# EAGLE board Gibbot v4.2-MotorDriverAlternate (EAGLE 5.12)
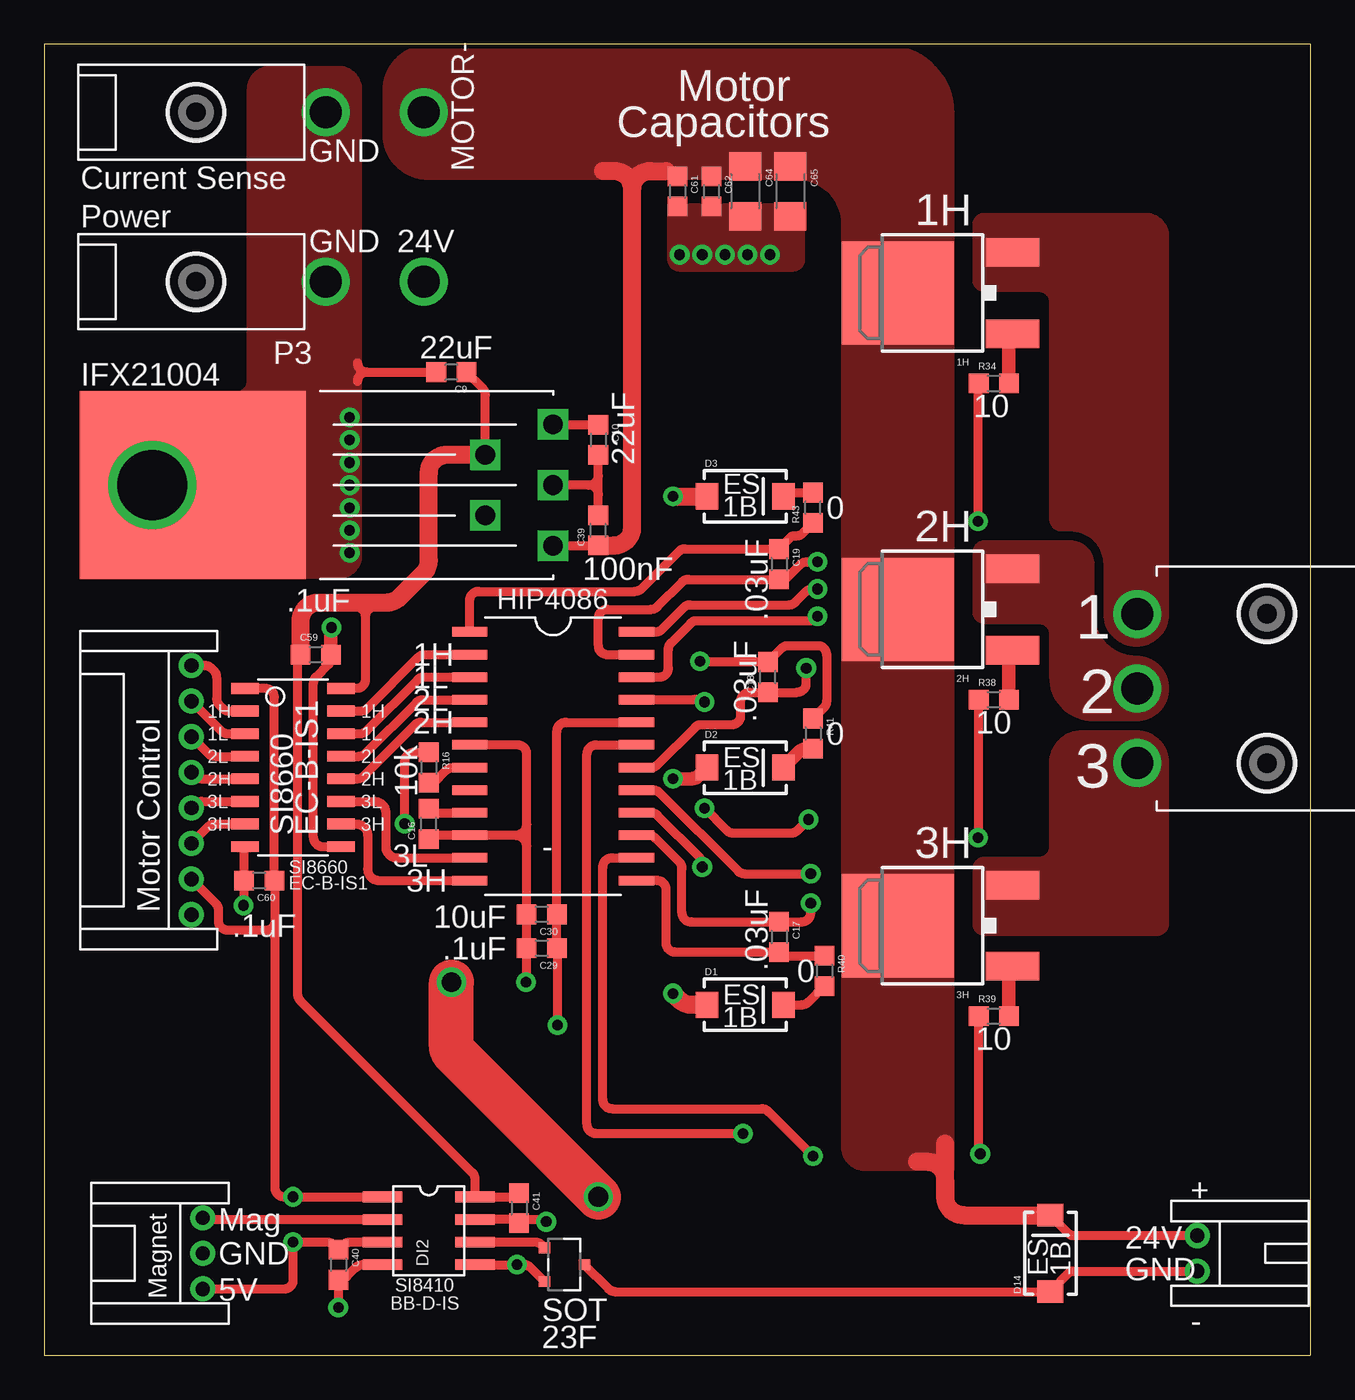
[diagram p0: board, top side]
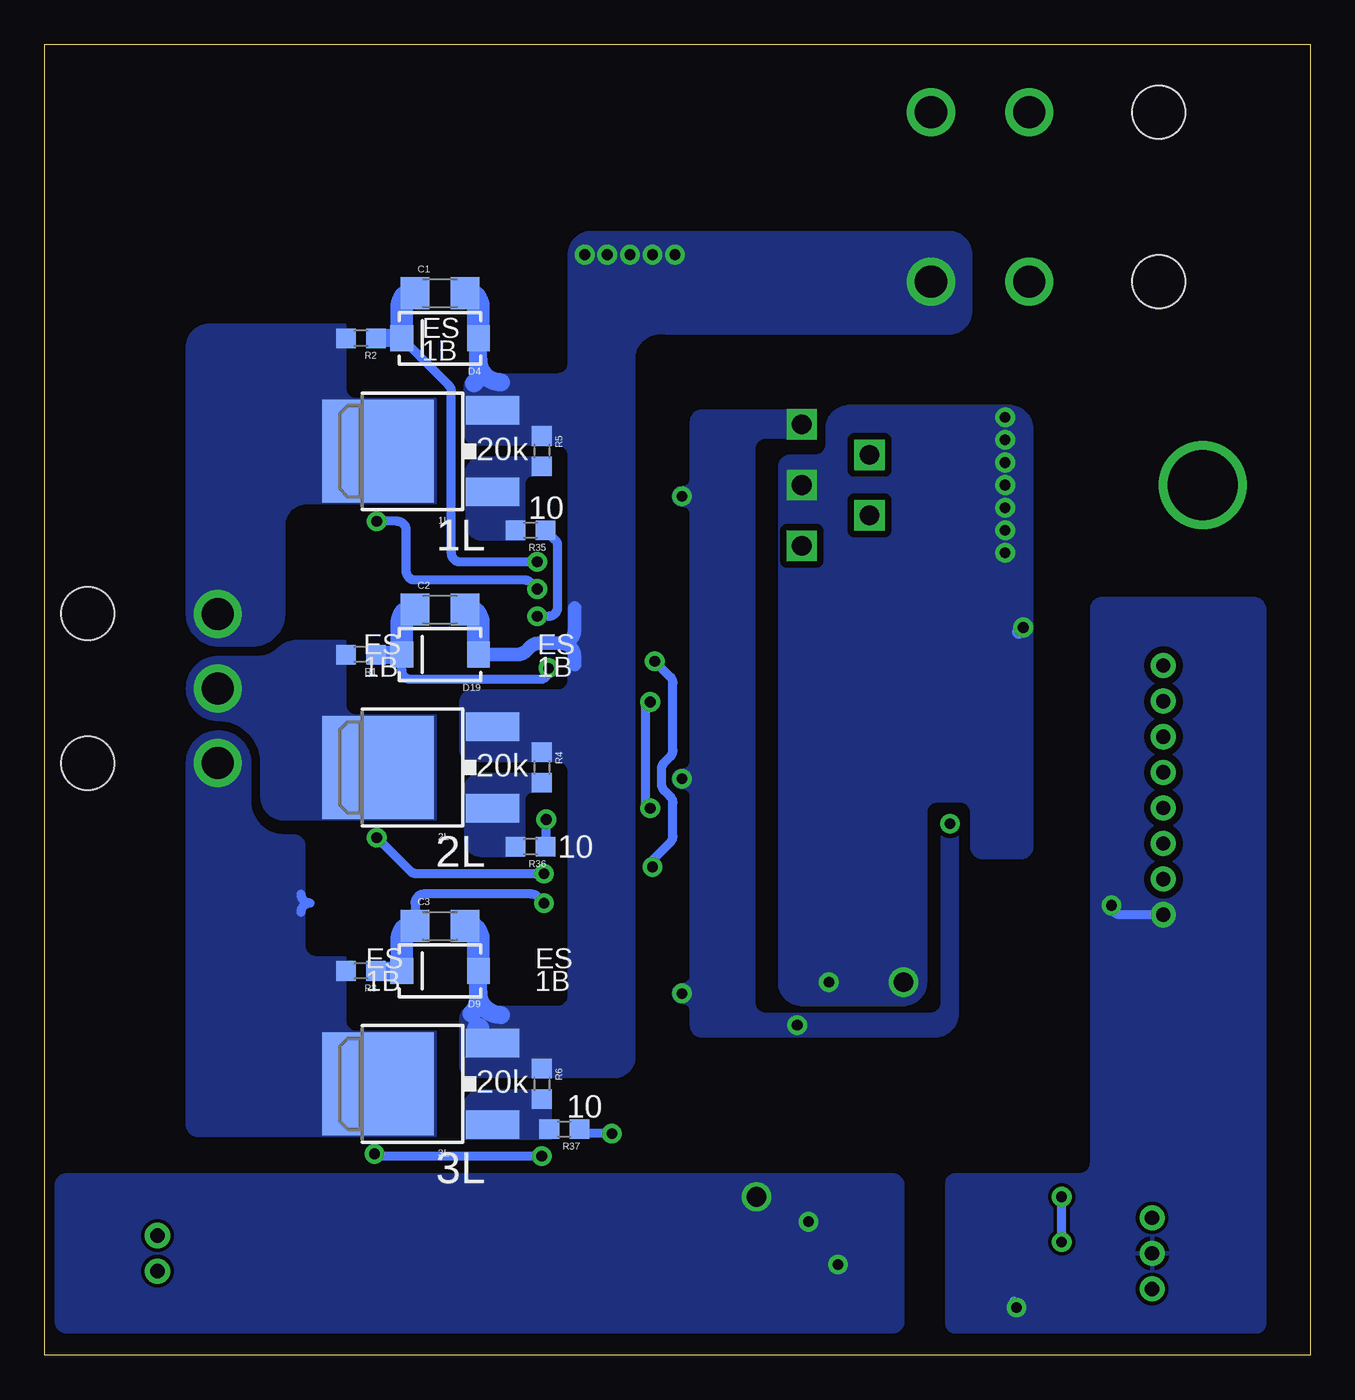
[diagram p1: board, bottom side, seen from below]

Size 71.12 x 73.66 mm. Coordinates in mm from the lower left corner, seen from the top.
Outline: 0,0 71.12,0 71.12,73.66 0,73.66 0,0
Copper layers (1*16): Top 0.035mm / dielectric 1.5mm / Bottom 0.035mm
Design rules "Andrew *": minimum track width 8mil, minimum drill 20mil, track to track 8mil, track to pad 8mil, pad to pad 2mil, via to via 8mil, smd to smd 8mil, copper to edge 10mil, drill to drill 8mil, minimum pad ring 12mil, minimum via ring 10mil, stop-mask expansion 4mil, vias tented up to drill 25mil, thermal gap 10mil

## Footprints (pad centres in the part's own frame; a part is rotated, then mirrored left to right if it is on the bottom)
DPAK = smd 5.791 x 6.274: D 0,1.587 | smd 1.6 x 3: G -2.286,-4.851; S 2.286,-4.851
1206 = smd 1.6 x 1.8: 1 -1.4,0; 2 1.4,0
0603 = smd 1.1 x 1.1: 1 -0.85,0; 2 0.85,0
SMA-DIODE@1 = smd 1.27 x 1.47: A -2.15,0; C 2.15,0
SOIC16-N = smd 0.6 x 1.55: 1 -4.445,-2.7; 2 -3.175,-2.7; 3 -1.905,-2.7; 4 -0.635,-2.7; 5 0.635,-2.7; 6 1.905,-2.7; 7 3.175,-2.7; 8 4.445,-2.7; 9 4.445,2.7; 10 3.175,2.7; 11 1.905,2.7; 12 0.635,2.7; 13 -0.635,2.7; 14 -1.905,2.7; 15 -3.175,2.7; 16 -4.445,2.7
SOIC8-N = smd 2.2 x 0.6: 1 -2.6,1.905; 2 -2.6,0.635; 3 -2.6,-0.635; 4 -2.6,-1.905; 5 2.6,-1.905; 6 2.6,-0.635; 7 2.6,0.635; 8 2.6,1.905
JST-8-PH-TH = drill 0.8 round: 1 -7,-6.35; 2 -5,-6.35; 3 -3,-6.35; 4 -1,-6.35; 5 1,-6.35; 6 3,-6.35; 7 5,-6.35; 8 7,-6.35
JST-3-PH-TH = drill 0.8 round: 1 -2,-6.35; 2 0,-6.35; 3 2,-6.35
JST-2-PH-TH = drill 0.8 round: 1 -1,-6.35; 2 1,-6.35
MOLEX-2-MINIFITJR-RA = drill 1.803 round: 1 0,13.894; 2 0,19.406 | hole 3: 0,6.604
MOLEX-3-MINIFITJR-RA = drill 1.803 round: 1 4.191,13.538; 2 0,13.538; 3 -4.191,13.538 | hole 3: -4.204,6.248; 4.204,6.248
SOT23F = smd 0.6 x 0.65: D 0,1.125; G -0.95,-1.125; S 0.95,-1.125
TO220-5 = drill 1.1 square: 1 3.81,-3.404; 2 0,-1.702; 3 3.81,0; 4 0,1.702; 5 3.81,3.404 | smd 12.7 x 10.541: PAD -16.434,0 | drill 3.937 round: PAD2 -18.72,0
SOIC24-W = smd 0.533 x 1.981: 1 -6.985,-4.686; 2 -5.715,-4.686; 3 -4.445,-4.686; 4 -3.175,-4.686; 5 -1.905,-4.686; 6 -0.635,-4.686; 7 0.635,-4.686; 8 1.905,-4.686; 9 3.175,-4.686; 10 4.445,-4.686; 11 5.715,-4.686; 12 6.985,-4.686; 13 6.985,4.686; 14 5.715,4.686; 15 4.445,4.686; 16 3.175,4.686; 17 1.905,4.686; 18 0.635,4.686; 19 -0.635,4.686; 20 -1.905,4.686; 21 -3.175,4.686; 22 -4.445,4.686; 23 -5.715,4.686; 24 -6.985,4.686

## Placement (x,y rotation side)
1H  IRLR024  [DPAK]  49.53,59.69 90 top
1L  IRLR024  [DPAK]  50.8,50.8 90 bottom
2H  IRLR024  [DPAK]  49.53,41.91 90 top
2L  IRLR024  [DPAK]  50.8,33.02 90 bottom
3H  IRLR024  [DPAK]  49.53,24.13 90 top
3L  IRLR024  [DPAK]  50.8,15.24 90 bottom
C1  [1206]  48.9,59.69 0 bottom
C2  [1206]  48.9,41.91 0 bottom
C3  [1206]  48.9,24.13 0 bottom
C9  22uF  [0603]  22.86,55.24 180 top
C10  22uF  [0603]  31.11,51.44 270 top
C16  DNI  [0603]  21.59,29.84 90 top
C17  .03uF  [0603]  41.27,23.5 270 top
C18  .03uF  [0603]  40.64,38.1 90 top
C19  .03uF  [0603]  41.27,44.45 270 top
C29  .1uF  [0603]  27.94,22.86 180 top
C30  10uF  [0603]  27.94,24.77 180 top
C39  100nF  [0603]  31.11,46.35 90 top
C40  .1uF  [0603]  16.51,5.08 270 top
C41  .1uF  [0603]  26.67,8.26 270 top
C59  .1uF  [0603]  15.24,39.37 0 top
C60  .1uF  [0603]  12.06,26.67 180 top
C61  [0603]  35.56,65.41 270 top
C62  [0603]  37.47,65.41 270 top
C64  [1206]  39.37,65.41 270 top
C65  [1206]  41.91,65.41 270 top
D1  ES1B  [SMA-DIODE@1]  39.37,19.68 0 top
D2  ES1B  [SMA-DIODE@1]  39.37,33.02 0 top
D3  ES1B  [SMA-DIODE@1]  39.37,48.26 0 top
D4  ES1B  [SMA-DIODE@1]  48.9,57.15 180 bottom
D9  ES1B  [SMA-DIODE@1]  48.9,21.59 180 bottom
D14  ES1B  [SMA-DIODE@1]  56.52,5.71 90 top
D19  ES1B  [SMA-DIODE@1]  48.9,39.37 180 bottom
DI1  DIGITAL-ISOLATOR-6CH  [SOIC16-N]  13.97,33.02 270 top
DI2  DIGITAL-ISOLATOR-1CHSOIC8-N  [SOIC8-N]  21.59,6.99 0 top
J12  MO8JST-SH-TH  [JST-8-PH-TH]  1.91,31.75 90 top
J13  [JST-3-PH-TH]  2.54,5.71 90 top
J14  [JST-2-PH-TH]  71.12,5.71 270 top
JP4  [MOLEX-2-MINIFITJR-RA]  1.91,69.85 270 top
JP5  [MOLEX-2-MINIFITJR-RA]  1.91,60.33 270 top
JP6  [MOLEX-3-MINIFITJR-RA]  74.93,37.47 90 top
M1  N-MOSSOT23F  [SOT23F]  29.21,5.08 270 top
P3  IFX21004TNV51  [TO220-5]  24.77,48.9 0 top
R1  [0603]  53.34,39.37 180 bottom
R2  [0603]  53.34,57.15 180 bottom
R3  [0603]  53.34,21.59 180 bottom
R4  20k  [0603]  43.18,33.02 270 bottom
R5  20k  [0603]  43.18,50.8 270 bottom
R6  20k  [0603]  43.18,15.24 270 bottom
R16  10k  [0603]  21.59,33.02 270 top
R34  10ohm  [0603]  53.34,54.61 0 top
R35  10ohm  [0603]  43.81,46.35 180 bottom
R36  10ohm  [0603]  43.81,28.57 180 bottom
R37  10ohm  [0603]  41.91,12.7 180 bottom
R38  10ohm  [0603]  53.34,36.83 0 top
R39  10ohm  [0603]  53.34,19.05 0 top
R40  0ohm  [0603]  43.81,21.59 270 top
R41  0ohm  [0603]  43.18,34.92 270 top
R43  0ohm  [0603]  43.18,47.62 90 top
U$22  HIP4086  [SOIC24-W]  28.57,33.66 270 top

## Library data of the parts
1H 1L 2H 2L 3H 3L C1-C3 C9 C10 C16-C19 C29 C30 C39-C41 C59-C62 C64 C65 D1-D4 D9 D14 D19 DI1 DI2 J12-J14 JP4-JP6 M1 P3 R1-R6 R16 R34-R41 R43 U$22 = Gibbot v4

## Nets
1HO: 1H.G R34.2
1HS: 1H.S 1L.D JP6.1 R2.2
1HSO: C1.1 C19.2 D4.C R2.1 U$22.23
1LO: 1L.G R5.2 R35.2
2HO: 2H.G R38.2
2HS: 2H.S 2L.D JP6.2 R1.2
2HSO: C2.1 C18.1 D19.C R1.1 U$22.18
2LO: 2L.G R4.2 R36.2
3HO: 3H.G R39.2
3HS: 3H.S 3L.D JP6.3 R3.2
3HSO: C3.1 C17.1 D9.C R3.1 U$22.15
3LO: 3L.G R6.2 R37.2
5V1: C9.1 C41.1 C59.1 DI1.16 DI2.8 P3.4
5V2: C40.1 C60.1 DI1.1 DI2.1 DI2.3 J12.2 J13.1
15V: C10.1 C29.1 C30.1 D1.A D2.A D3.A P3.5 U$22.20
15V5: R16.1
24V: 1H.D 2H.D 3H.D C39.1 C61.1 C62.1 C64.1 C65.1 D14.C J14.1 JP4.2 P3.1
GND1: C9.2 C10.2 C16.1 C29.2 C30.2 C39.2 C41.2 C59.2 DI1.9 DI2.5 DI2.7 JP4.1 JP5.1 M1.S P3.3 P3.PAD P3.PAD2 U$22.6 U$22.10
GND2: C40.2 C60.2 DI1.8 DI2.4 J12.1 J13.2
MOTOR-: 1L.S 2L.S 3L.S C1.2 C2.2 C3.2 C61.2 C62.2 C64.2 C65.2 D4.A D9.A D19.A JP5.2 R4.1 R5.1 R6.1
N$2: R16.2 U$22.7
N$3: C16.2 U$22.9
N$26: R34.1 U$22.24
N$35: R35.1 U$22.22
N$36: R36.1 U$22.21
N$37: R37.1 U$22.19
N$38: R38.1 U$22.17
N$48: R39.1 U$22.14
N$50: C17.2 R40.1 U$22.13
N$52: C18.2 R41.1 U$22.16
N$54: C19.1 R43.1 U$22.1
N$55: D3.C R43.2
N$57: D14.A J14.2 M1.D
N$58: D2.C R41.2
N$59: D1.C R40.2
PWM1H: DI1.2 J12.8
PWM1HO: DI1.15 U$22.2
PWM1L: DI1.3 J12.7
PWM1LO: DI1.14 U$22.3
PWM2H: DI1.5 J12.5
PWM2HO: DI1.12 U$22.5
PWM2L: DI1.4 J12.6
PWM2LO: DI1.13 U$22.4
PWM3H: DI1.7 J12.3
PWM3HO: DI1.10 U$22.12
PWM3L: DI1.6 J12.4
PWM3LO: DI1.11 U$22.11
TOP_MAG: DI2.2 J13.3
TOP_MAGO: DI2.6 M1.G

## Tracks (layer width: path | path; a pad name or v marks a point on that pad's centre or on a via)
1HO
  Top 0.203: 1H.G 54.19,57.4
  Top 0.762: R34.2 54.19,57.21 1H.G
1HS
  pour Bottom (no thermals): 57.66,41.66 63.12,41.66 63.12,56.64 arc90 61.85,57.91 56.64,57.91 56.39,47.88 arc-90 57.66,46.61
  pour Bottom (no thermals): 61.34,43.43 arc-90 63.12,41.66 arc-90 61.34,39.88 arc-90 59.56,41.66 arc-90
  pour Bottom (no thermals): 49.15,53.72 49.15,47.88 60.58,47.88 60.58,57.91 54.23,57.91 54.23,54.36 arc-90 53.59,53.72
  pour Bottom (no thermals): 57.66,41.66 arc90 59.44,39.88 61.34,39.88 61.34,41.66
  pour Top (no thermals): 61.34,43.43 arc-90 63.12,41.66 arc-90 61.34,39.88 arc-90 59.56,41.66 arc-90
  pour Top (no thermals): 59.56,41.66 63.12,41.66 63.12,62.87 arc90 61.85,64.14 59.56,64.14
  pour Top (no thermals): 52.2,63.5 52.2,60.45 arc90 52.83,59.82 55.88,59.82 arc-90 56.52,59.18 56.52,46.99 arc90 57.15,46.35 57.66,46.35 arc-90 59.56,44.45 59.94,44.45 59.94,59.82 arc90 60.58,60.45 60.58,64.14 52.83,64.14 arc90
1HSO  (via drill 0.6)
  Top 0.508: v43.43,44.58 42.82,44.58 arc45 42.46,44.43 41.78,43.75 arc-45 41.42,43.6 C19.2 36.19,43.6 arc45 35.83,43.45 34.44,42.06 arc-45 34.08,41.91 31.62,41.91 arc90 31.11,41.4 31.11,39.88 arc90 31.62,39.37 U$22.23
  Bottom 0.508: v43.43,44.58 47.75,44.58 arc90 48.26,45.09 48.26,54.16 arc-45 48.41,54.51 D4.C
  Bottom 1.016: D4.C R2.1
  Bottom 1.27: C1.1 arc-90 51.05,58.94 D4.C
1LO
  Bottom 0.203: 45.3,48.51 1L.G
  pour Bottom (no thermals): 42.7,50.42 46.56,50.42 arc-90 47.37,49.63 47.37,46.69 arc-90 46.56,45.87 44.2,45.87 44.2,48.97 arc90 43.69,49.48 42.7,49.48
2HO
  Top 0.762: R38.2 54.19,39.43 2H.G
2HS
  pour Top (no thermals): 61.34,39.24 arc-90 63.12,37.47 arc-90 61.34,35.69 arc-90 59.56,37.47 arc-90
  pour Bottom (no thermals): 61.34,39.24 arc-90 63.12,37.47 arc-90 61.34,35.69 arc-90 59.56,37.47 arc-90
  pour Bottom (no thermals): 55.88,40.13 56.92,40.13 arc-45 58,39.69 arc45 59.08,39.24 61.34,39.24 61.34,35.69 arc90 58.93,33.27 58.93,31.37 arc-90 57.66,30.1 55.88,30.1
  pour Bottom (no thermals): 49.15,35.94 49.15,30.1 56.39,30.1 56.39,40.13 54.23,40.13 54.23,36.58 arc-90 53.59,35.94
  pour Top (no thermals): 52.2,45.09 52.2,41.78 arc90 52.83,41.15 56.52,41.15 56.26,45.72 52.83,45.72 arc90
  pour Top (no thermals): 54.99,45.72 57.66,45.72 arc-90 58.93,44.45 58.93,41.66 arc90 61.34,39.24 61.34,35.69 58.93,35.69 arc-90 56.52,38.1 56.52,40.51 arc90 55.88,41.15 54.99,41.15
2HSO  (via drill 0.6)
  Top 0.508: U$22.18 34.08,33.02 arc45 34.44,33.17 36.55,35.28 arc-45 36.91,35.43 38.61,35.43 arc90 39.12,35.94 39.12,36.74 arc-90 39.62,37.25 C18.1 42.29,37.25 arc90 42.8,37.76 v42.8,38.61
  Bottom 0.508: v42.8,38.61 42.8,38.48 arc90 43.31,37.97 50.54,37.97 arc90 51.05,38.48 D19.C
  Bottom 1.016: R1.1 D19.C
  Bottom 1.27: C2.1 arc-90 51.05,41.16 D19.C
2LO
  pour Bottom (no thermals): 42.7,32.64 46.63,32.64 arc-90 47.45,31.85 47.45,28.91 arc-90 46.63,28.09 44.2,28.09 44.2,31.19 arc90 43.69,31.7 42.7,31.7
3HO
  Top 0.762: R39.2 54.19,21.65 3H.G
3HS
  Bottom 0.508: 56.71,25.91 arc-90 56.2,25.4 arc-90 56.71,24.89
  pour Bottom (no thermals): 59.56,33.27 63.12,33.27 63.12,12.95 arc-90 62.48,12.32 56.9,12.32 arc-90 56.26,12.95 56.26,22.35 58.29,22.35 arc90 59.56,23.62
  pour Bottom (no thermals): 49.15,18.16 49.15,12.32 60.58,12.32 60.58,22.35 54.23,22.35 54.23,18.8 arc-90 53.59,18.16
  pour Bottom (no thermals): 61.34,35.05 arc-90 63.12,33.27 arc-90 61.34,31.5 arc-90 59.56,33.27 arc-90
  pour Top (no thermals): 61.34,35.05 arc-90 63.12,33.27 arc-90 61.34,31.5 arc-90 59.56,33.27 arc-90
  pour Top (no thermals): 52.2,27.3 52.2,24.26 arc90 52.83,23.62 62.48,23.62 arc90 63.12,24.26 63.12,33.27 59.56,33.27 59.56,29.21 arc-90 58.29,27.94 52.83,27.94 arc90
  pour Top (no thermals): 54.48,27.94 55.88,27.94 arc90 56.52,28.57 56.52,33.27 arc-90 58.29,35.05 61.34,35.05 61.34,27.56 54.48,27.56
  pour Bottom (no thermals): 59.56,32.38 59.56,31.11 arc-90 57.66,29.21 57.15,29.21 arc90 56.52,28.57 56.52,22.99 arc-90 55.88,22.35 54.74,22.35 54.74,21.59 61.72,21.59 61.72,32.38
3HSO  (via drill 0.6)
  Top 0.508: U$22.15 33.95,29.21 arc-45 34.31,29.06 35.66,27.71 arc-45 35.81,27.35 35.81,24.85 arc90 36.32,24.34 C17.1 42.55,24.34 arc90 43.05,24.85 v43.05,25.4
  Bottom 0.508: C3.1 50.3,25.4 arc90 49.79,25.91 43.77,25.91 arc45 43.41,25.76 v43.05,25.4
  Bottom 1.016: D9.C R3.1
  Bottom 1.27: C3.1 arc-90 51.05,23.38 D9.C
3LO
  pour Bottom (no thermals): 42.7,14.86 46.63,14.86 arc-90 47.45,14.07 47.45,12.19 42.7,12.19
5V1
  Top 0.406: 14.22,39.2 14.39,39.2 C59.1
  Top 0.508: C9.1 24.62,54.34 arc-45 24.77,53.98 P3.4 | DI1.16 17.53,37.47 arc90 18.03,37.97 18.03,41.53 | 18.03,41.53 arc90 17.53,42.04 | 18.03,41.53 arc-90 18.54,42.04 arc-90 18.8,42.29 19.23,42.29 | C41.1 arc-90 26.45,8.89 DI2.8 24.19,9.89 arc45 24.04,10.25 14.37,19.92 arc-45 14.22,20.28 14.22,39.2
  Top 1.016: P3.4 22.61,50.6 arc90 21.59,49.58 21.59,44.66 arc-45 21.29,43.94 19.94,42.59 arc-45 19.23,42.29 15.41,42.29 arc90 14.39,41.27 C59.1
5V2  (via drill 0.6)
  Top 0.508: DI1.1 12.41,37.47 arc-90 12.91,36.96 C60.1 arc-90 12.95,26.63 12.95,24.38 | J12.2 9.63,25.38 arc-45 9.78,25.02 9.78,24.38 arc90 10.29,23.88 12.45,23.88 | J13.1 13.46,3.71 arc90 13.97,4.22 v13.97,6.35 15.88,6.35 arc-45 16.24,6.2 C40.1 | DI2.1 v13.97,8.89 13.46,8.89 arc-90 12.95,9.4 12.95,23.37 | DI2.3 17.19,6.35 arc45 16.74,6.16 C40.1 | C40.1 16.44,5.86 | 12.95,24.38 arc-90 12.45,23.88 | 12.95,23.37 12.95,24.38 | 12.95,23.37 arc90 12.45,23.88
  Bottom 0.508: v13.97,6.35 v13.97,8.89
15V  (via drill 0.6)
  Top 0.254: 28.83,22.86 C29.1
  Top 0.508: C10.1 arc90 C10.1 P3.5 | v28.83,18.54 28.83,22.86 | C29.1 C30.1 28.79,35.05 arc-90 29.3,35.56 U$22.20
  Top 0.762: v35.31,32.38 36.32,32.38 arc45 36.77,32.57 D2.A
  Top 1.016: v35.31,48.26 D3.A | D1.A 36.36,19.68 arc-45 35.64,19.98 v35.31,20.32
  pour Bottom (isolate 0.254, no thermals): 27.81,53.09 34.16,53.09 arc-90 34.8,52.45 34.8,33.4 arc90 35.31,32.89 arc-90 35.81,32.38 arc-90 35.31,31.88 arc90 34.8,31.37 34.8,18.54 arc-90 34.16,17.91 21.08,17.91 arc-90 19.81,19.18 19.81,29.84 arc-90 20.19,30.35 arc-90 20.7,29.84 20.7,19.81 arc90 21.34,19.18 30.61,19.18 arc90 31.24,19.81 31.24,50.93 arc90 30.61,51.56 27.81,51.56
  pour Bottom: 34.8,21.84 34.8,21.34 arc90 35.31,20.83 arc-90 35.81,20.32 arc-90 35.31,19.81 arc90 34.8,19.3 34.8,19.05 34.67,19.05 arc-90 34.54,19.18 34.54,21.84
  pour Bottom: 34.8,33.91 34.8,33.4 arc90 35.31,32.89 arc-90 35.81,32.38 arc-90 35.31,31.88 arc90 34.8,31.37 34.8,30.48 34.67,30.48 arc-90 34.54,30.61 34.54,33.91
  pour Bottom: 34.8,49.78 34.8,49.28 arc90 35.31,48.77 arc-90 35.81,48.26 arc-90 35.31,47.75 arc90 34.8,47.24 34.8,46.35 34.67,46.35 arc-90 34.54,46.48 34.54,49.78
15V5  (via drill 0.6)
  Top 0.508: R16.1 20.75,33.87 arc90 20.24,33.36 v20.24,29.87
24V
  Top 0.508: P3.1 arc-90 28.59,45.51 C39.1 | D14.C 57.59,6.79 arc45 57.77,6.71 J14.1
  Top 1.016: C39.1 32,45.51 arc90 33.02,46.52 33.02,65.53 | 33.02,65.53 arc-90 34.04,66.55 34.92,66.55 | 33.02,65.53 arc90 32,66.55 31.37,66.55 | D14.C 51.63,7.87 arc-90 50.61,8.88 50.61,9.84 arc90 49.59,10.86 49.02,10.86 | 50.61,8.95 50.61,11.87
  pour Top (no thermals): 50.42,66.67 arc-90 51.05,66.04 51.05,10.41 46.1,10.41 arc-90 44.83,11.68 44.83,66.04 arc-90 45.47,66.67
  pour Top (no thermals): 21.59,73.6 47.24,73.6 arc-90 51.05,69.79 51.05,63.56 44.83,63.56 arc90 42.29,66.1 21.59,66.1 arc-90 19.05,68.64 19.05,71.06 arc-90
GND1  (via drill 0.6, 1.1)
  Top 0.508: 18.1,55.24 arc90 17.59,54.74 | 18.1,55.24 C9.2 | 17.59,55.75 arc90 18.1,55.24 | 30.61,48.9 arc-90 31.11,48.39 C39.2 C10.2 | 30.61,48.9 arc90 31.11,49.4 | 30.61,48.9 P3.3 | U$22.6 26.58,34.29 arc-90 27.09,33.78 27.09,29.84 | v27.05,20.95 arc90 27.09,20.99 C29.2 C30.2 27.09,29.84 | C16.1 arc-90 21.8,29.21 U$22.10 26.45,29.21 | 27.09,29.84 arc-90 26.45,29.21 | 26.45,29.21 arc-90 27.09,28.57 | DI1.9 15.62,28.57 arc-90 15.11,29.08 15.11,37.76 arc-45 15.26,38.12 15.94,38.8 arc45 16.09,39.16 | 26.45,7.62 DI2.7 | C41.2 arc90 26.45,7.62 | DI2.5 v26.54,5.08 26.93,5.08 arc-45 27.28,4.93 M1.S | 26.45,7.62 27.89,7.62 arc-45 v28.19,7.49
  Top 0.762: 16.09,39.16 C59.2 16.09,40.6 arc-90 v16.13,40.89
  Top 2.54: v31.11,8.89 23.04,16.97 arc-45 22.86,17.4 v22.86,20.95
  Bottom 0.508: v27.05,20.95 26.92,20.95
  Bottom 0.762: v16.13,40.89 16.38,40.64
  other vias: 17.14,52.7 17.14,51.44 17.14,50.16 17.14,48.9 17.14,46.35 17.14,45.09 17.14,47.62
  pour Top (no thermals): 16.51,72.39 arc-90 17.78,71.12 17.78,44.96 arc-90 16.51,43.69 9.53,43.69 arc-90 8.26,44.96 8.26,53.47 arc-90 8.89,54.1 10.79,54.1 arc90 11.43,54.74 11.43,71.12 arc-90 12.7,72.39
  pour Bottom (isolate 0.381, no thermals): 21.59,20.95 21.59,30.48 arc90 20.95,31.11 19.68,31.11 arc90 19.05,30.48 19.05,28.57 arc-90 18.41,27.94 16.26,27.94 arc-90 15.62,28.57 15.62,52.07 arc-90 16.89,53.34 25.91,53.34 arc-90 27.18,52.07 27.18,51.18 arc90 27.81,50.55 29.21,50.55 arc-90 29.84,49.91 29.84,20.95 arc-90 28.57,19.68 22.86,19.68 arc-90
  pour Bottom (no thermals): 23.5,1.27 69.85,1.27 arc90 70.48,1.91 70.48,9.53 arc90 69.85,10.16 23.5,10.16 arc90 22.86,9.53 22.86,1.91 arc90
GND2  (via drill 0.6)
  Top 0.508: DI1.8 arc90 11.21,28.52 C60.2 11.21,25.31 arc-90 v11.18,25.27 | DI2.4 17.92,5.08 arc45 17.47,4.89 16.99,4.42 arc-45 16.54,4.23 C40.2 v16.51,2.67
  Bottom 0.508: v11.18,25.27 11.18,25.26 arc-90 10.67,24.75 J12.1 | v16.51,2.67 16.64,3.05
  pour Bottom (isolate 0.381, no thermals): 11.68,42.55 arc-90 12.32,41.91 12.32,8.89 arc-90 11.68,8.26 3.17,8.26 arc-90 2.54,8.89 2.54,41.91 arc-90 3.17,42.55
  pour Bottom: 3.05,10.16 10.29,10.16 arc90 10.79,10.67 10.79,12.19 arc-90 11.3,12.7 11.81,12.7 arc-90 12.32,12.19 12.32,10.79 arc90 12.95,10.16 19.94,10.16 arc-90 20.45,9.65 20.45,1.78 arc-90 19.94,1.27 3.05,1.27 arc-90 2.54,1.78 2.54,9.65 arc-90
MOTOR-  (via drill 0.6)
  Bottom 0.762: D19.A 44.58,39.37 arc-45 44.04,39.59 43.85,39.78 arc45 43.31,40.01 42.1,40.01 | 42.1,40.01 arc-90 41.34,40.77 41.34,41.97 | 42.1,40.01 arc90 41.34,39.24 41.34,38.8
  Bottom 1.016: 45.48,19.11 arc90 46.74,20.38 | D9.A 46.74,20.07 arc45 47.12,19.18 | 45.48,54.67 arc90 46.74,55.94 | D4.A 46.74,55.25 arc45 46.99,54.61
  Bottom 1.27: 3L.S arc90 46.74,18.32 | C3.2 arc90 46.74,23.38 D9.A | C1.2 arc90 46.74,58.94 D4.A | C2.2 arc90 46.74,41.16 D19.A
  other vias: 35.69,61.85 36.96,61.85 38.23,61.85 39.5,61.85 40.77,61.85
  pour Bottom (no thermals): 37.97,17.02 37.97,56.52 41.66,56.52 41.66,17.02
  pour Bottom (no thermals): 41.66,56.26 41.66,55.75 arc90 42.29,55.12 46.86,55.12 arc-90 47.5,54.48 47.5,51.82 arc-90 46.86,51.18 42.29,51.18 arc90 41.66,50.55 41.66,50.42 40.77,50.42 40.77,58.17
  pour Bottom (no thermals): 41.66,38.48 41.66,37.97 arc90 42.29,37.34 47.12,37.34 arc-90 47.75,36.7 47.75,34.04 arc-90 47.12,33.4 42.29,33.4 arc90 41.66,32.77 41.66,32.64 40.77,32.64 40.77,38.48
  pour Bottom (no thermals): 41.66,20.7 41.66,20.19 arc90 42.29,19.56 47.12,19.56 arc-90 47.75,18.92 47.75,16.26 arc-90 47.12,15.62 39.12,15.62 arc-90 37.97,16.76 37.97,20.7
  pour Bottom (no thermals): 19.05,58.67 19.05,61.85 arc-90 20.32,63.12 40.39,63.12 arc-90 41.66,61.85 41.66,56.26 37.97,56.26 arc90 36.2,57.4 20.32,57.4 arc-90
  pour Top (no thermals): 42.67,64.64 35.05,64.64 35.05,61.59 arc90 35.69,60.96 42.04,60.96 arc90 42.67,61.59
N$2
  Top 0.508: U$22.7 22.94,33.02 arc45 22.58,32.87 21.87,32.16 21.62,32.16 arc-45 R16.2
N$3
  Top 0.508: C16.2 arc90 21.8,30.48 U$22.9
N$26  (via drill 0.6)
  Top 0.508: v43.43,43.05 43.14,43.05 arc45 42.78,42.9 42.19,42.31 arc-45 41.83,42.16 36.28,42.16 arc45 35.92,42.02 34.69,40.79 arc-45 34.33,40.64 U$22.24 | v52.45,46.86 52.45,54.57 arc-90 R34.1
  Bottom 0.508: v52.45,46.86 51.31,46.86 arc90 50.8,46.35 50.8,44.07 arc-90 50.29,43.56 44.15,43.56 arc45 43.79,43.41 v43.43,43.05
N$35  (via drill 0.6)
  Top 0.508: U$22.22 34.54,38.1 arc90 35.05,38.61 35.05,39.67 arc-45 35.2,40.03 36.3,41.13 arc-45 36.66,41.27 42.97,41.27 arc45 43.33,41.42 v43.43,41.53
  Bottom 0.508: R35.1 42.44,45.83 arc45 42.29,45.47 42.29,42.04 arc90 42.8,41.53 v43.43,41.53
N$36  (via drill 0.6)
  Top 0.508: v37.08,36.7 arc45 36.4,36.83 U$22.21 | v42.93,30.1 42.31,29.49 arc-45 41.95,29.34 38.69,29.34 arc-45 38.33,29.49 v37.08,30.73
  Bottom 0.508: R36.1 42.97,30.06 arc90 v42.93,30.1 | v37.08,30.73 arc90 37.34,30.99 37.34,36.45 arc90 v37.08,36.7
N$37  (via drill 0.6)
  Top 0.508: U$22.19 30.99,34.29 arc90 30.48,33.78 30.48,12.95 arc90 30.99,12.45 v39.24,12.45
  Bottom 0.508: v39.24,12.45 40.81,12.45 arc90 R37.1
N$38  (via drill 0.6)
  Top 0.508: U$22.17 34.21,31.75 arc-45 34.57,31.6 38.97,27.2 arc45 39.33,27.05 v43.05,27.05 | R38.1 52.49,29.12 arc-90 v52.45,29.08
  Bottom 0.508: v43.05,27.05 50.21,27.05 arc45 50.57,27.2 v52.45,29.08
N$48  (via drill 0.6)
  Top 0.508: U$22.14 31.88,27.94 arc90 31.37,27.43 31.37,14.35 arc90 31.88,13.84 40.3,13.84 arc-45 40.66,13.69 v43.18,11.18 | R39.1 52.49,11.39 arc90 v52.58,11.3
  Bottom 0.508: v52.58,11.3 arc-90 52.45,11.18 v43.18,11.18
N$50
  Top 0.508: R40.1 41.69,22.44 arc-45 41.33,22.59 C17.2 35.43,22.64 arc-90 34.92,23.15 34.92,26.16 arc90 34.42,26.67 U$22.13
N$52  (via drill 0.6)
  Top 0.508: C18.2 arc-90 40.93,39.24 | 43.35,35.94 R41.1 43.79,36.39 arc45 43.94,36.75 43.94,39.37 arc90 43.43,39.88 41.78,39.88 arc45 41.42,39.73 C18.2 | U$22.16 34.08,30.48 arc-45 34.44,30.33 36.81,27.96 arc-45 36.96,27.6 v36.96,27.43 | v36.83,38.99 40.55,38.99 arc-45 C18.2
  Bottom 0.508: v36.83,38.99 35.96,38.12 arc45 35.81,37.76 35.81,33.99 arc45 35.96,33.63 36.3,33.3 arc-45 36.45,32.94 36.45,32.09 arc-45 36.3,31.73 35.96,31.39 arc45 35.81,31.03 35.81,29.17 arc45 35.96,28.81 36.81,27.96 arc-45 36.96,27.6 v36.96,27.43
N$54
  Top 0.203: 41.27,45.31 C19.1
  Top 0.508: R43.1 42.59,46.19 arc-45 42.23,46.04 42.1,46.04 arc45 41.93,45.97 41.27,45.31 36,45.31 arc45 35.64,45.16 33.55,43.08 arc-45 33.19,42.93 24.4,42.93 arc90 23.89,42.42 U$22.1
N$55
  Top 0.508: R43.2 41.73,48.48 arc90 D3.C
N$57
  Top 0.508: M1.D 31.7,3.71 arc45 32.06,3.56 D14.A 57.59,4.64 arc-45 57.77,4.71 J14.2
N$58
  Top 0.762: D2.C 42.39,33.89 arc-45 42.84,34.08 R41.2
N$59
  Top 0.508: D1.C 42.55,19.68 arc45 42.91,19.83 R40.2
PWM1H
  Top 0.508: DI1.2 10.37,36.2 arc-45 10.01,36.34 9.83,36.53 arc-45 9.68,36.89 9.68,38.09 arc45 9.53,38.45 9.38,38.6 arc45 9.02,38.75 J12.8
PWM1HO
  Top 0.508: DI1.15 17.77,36.2 arc45 18.13,36.34 21.01,39.22 arc-45 21.37,39.37 U$22.2
PWM1L
  Top 0.508: DI1.3 10.29,34.92 arc-45 9.93,35.07 J12.7
PWM1LO
  Top 0.508: DI1.14 17.72,34.92 arc45 18.08,35.07 20.96,37.95 arc-45 21.32,38.1 U$22.3
PWM2H
  Top 0.508: DI1.5 8.83,32.38 arc-45 8.47,32.53 J12.5
PWM2HO
  Top 0.508: U$22.5 21.16,35.56 arc45 20.81,35.41 17.93,32.53 arc-45 17.57,32.38 DI1.12
PWM2L
  Top 0.508: DI1.4 9.56,33.66 arc-45 9.2,33.8 J12.6
PWM2LO
  Top 0.508: DI1.13 17.67,33.66 arc45 18.03,33.8 20.91,36.68 arc-45 21.27,36.83 U$22.4
PWM3H
  Top 0.508: DI1.7 9.56,29.84 arc45 9.2,29.7 J12.3
PWM3HO
  Top 0.508: DI1.10 17.53,29.84 arc-90 18.16,29.21 18.16,27.3 arc90 18.8,26.67 U$22.12
PWM3L
  Top 0.508: DI1.6 8.83,31.11 arc45 8.47,30.97 J12.4
PWM3LO
  Top 0.508: DI1.11 18.54,31.11 arc-90 19.18,30.48 19.18,28.57 arc90 19.81,27.94 U$22.11
TOP_MAG
  Top 0.508: DI2.2 9.12,7.62 arc-45 J13.3
TOP_MAGO
  Top 0.508: DI2.6 27.55,6.35 arc-45 27.91,6.2 M1.G

## Text on the board
tPlace: Motor | Capacitors | GND | MOTOR- | Current Sense | 1H | Power | GND | 24V | 22uF | IFX21004 | 10 | 22uF | ES | 1B | 0 | 2H | 100nF | .1uF | HIP4086 | .03uF | 1 | 1H | 1L | 1H | 1H | 2L | .03uF | 2 | 1L | 1L | 2H | 10 | 0 | 2L | 2L | ES | 2H | 2H | 1B | 3 | 3L | 3L | 10k | 3H | SI8660 | EC-B-IS1 | 3H | - | 3H | SI8660 | 3L | EC-B-IS1 | 3H | Motor Control | 10uF | .1uF | .1uF | .03uF | 0 | ES | 1B | 10 | + | Mag | 24V | GND | SI8410 | ES | 1B | GND | Magnet | 5V | BB-D-IS | SOT | - | 23F
bPlace: ES | 1B | 20k | 10 | 1L | ES | ES | 1B | 1B | 20k | 2L | 10 | ES | ES | 1B | 1B | 20k | 10 | 3L